# Altium PCB FlybackDriverZVS.PcbDoc
Units mm, origin at the board's own origin, x right, y up, seen from the top; angles counter-clockwise.
Board outline 62.6 x 92.6 mm, 2 copper layers (Top Layer, Bottom Layer), stack 1.331 mm thick; 25 components, 8 nets, 51 pads, 6 vias.
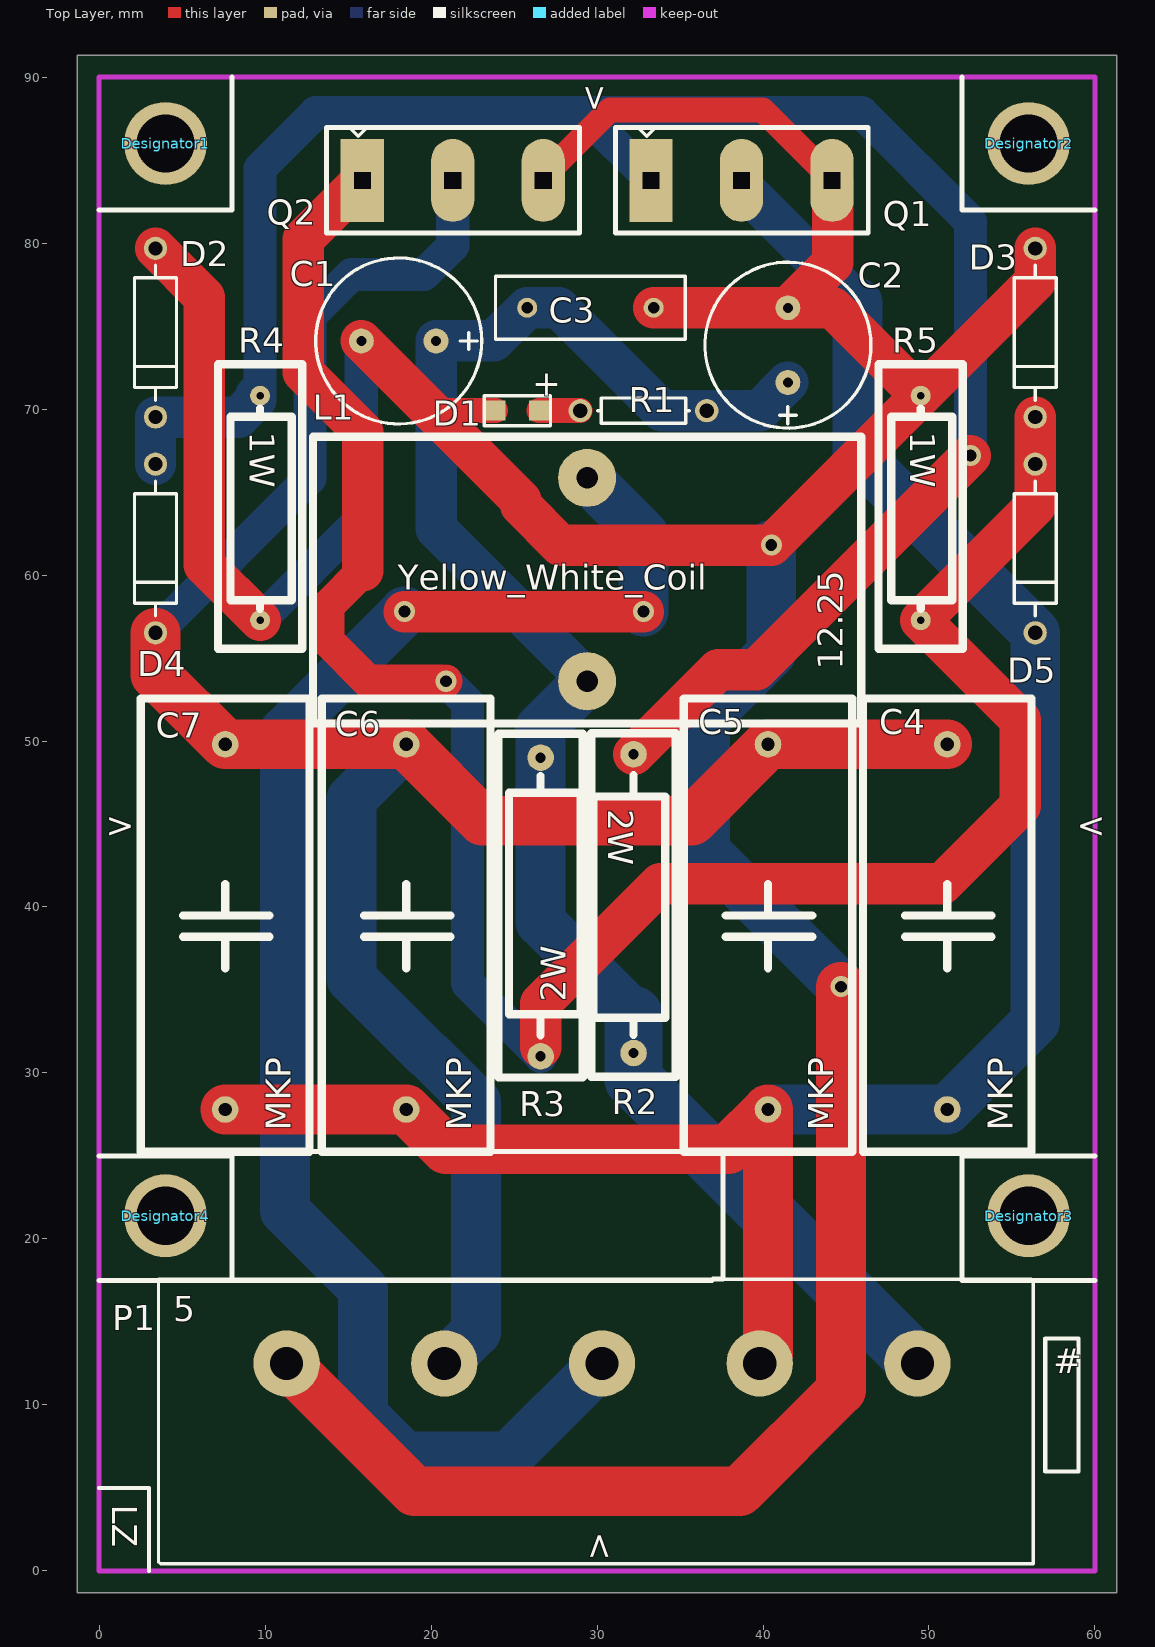
[diagram p0: Top Layer view]
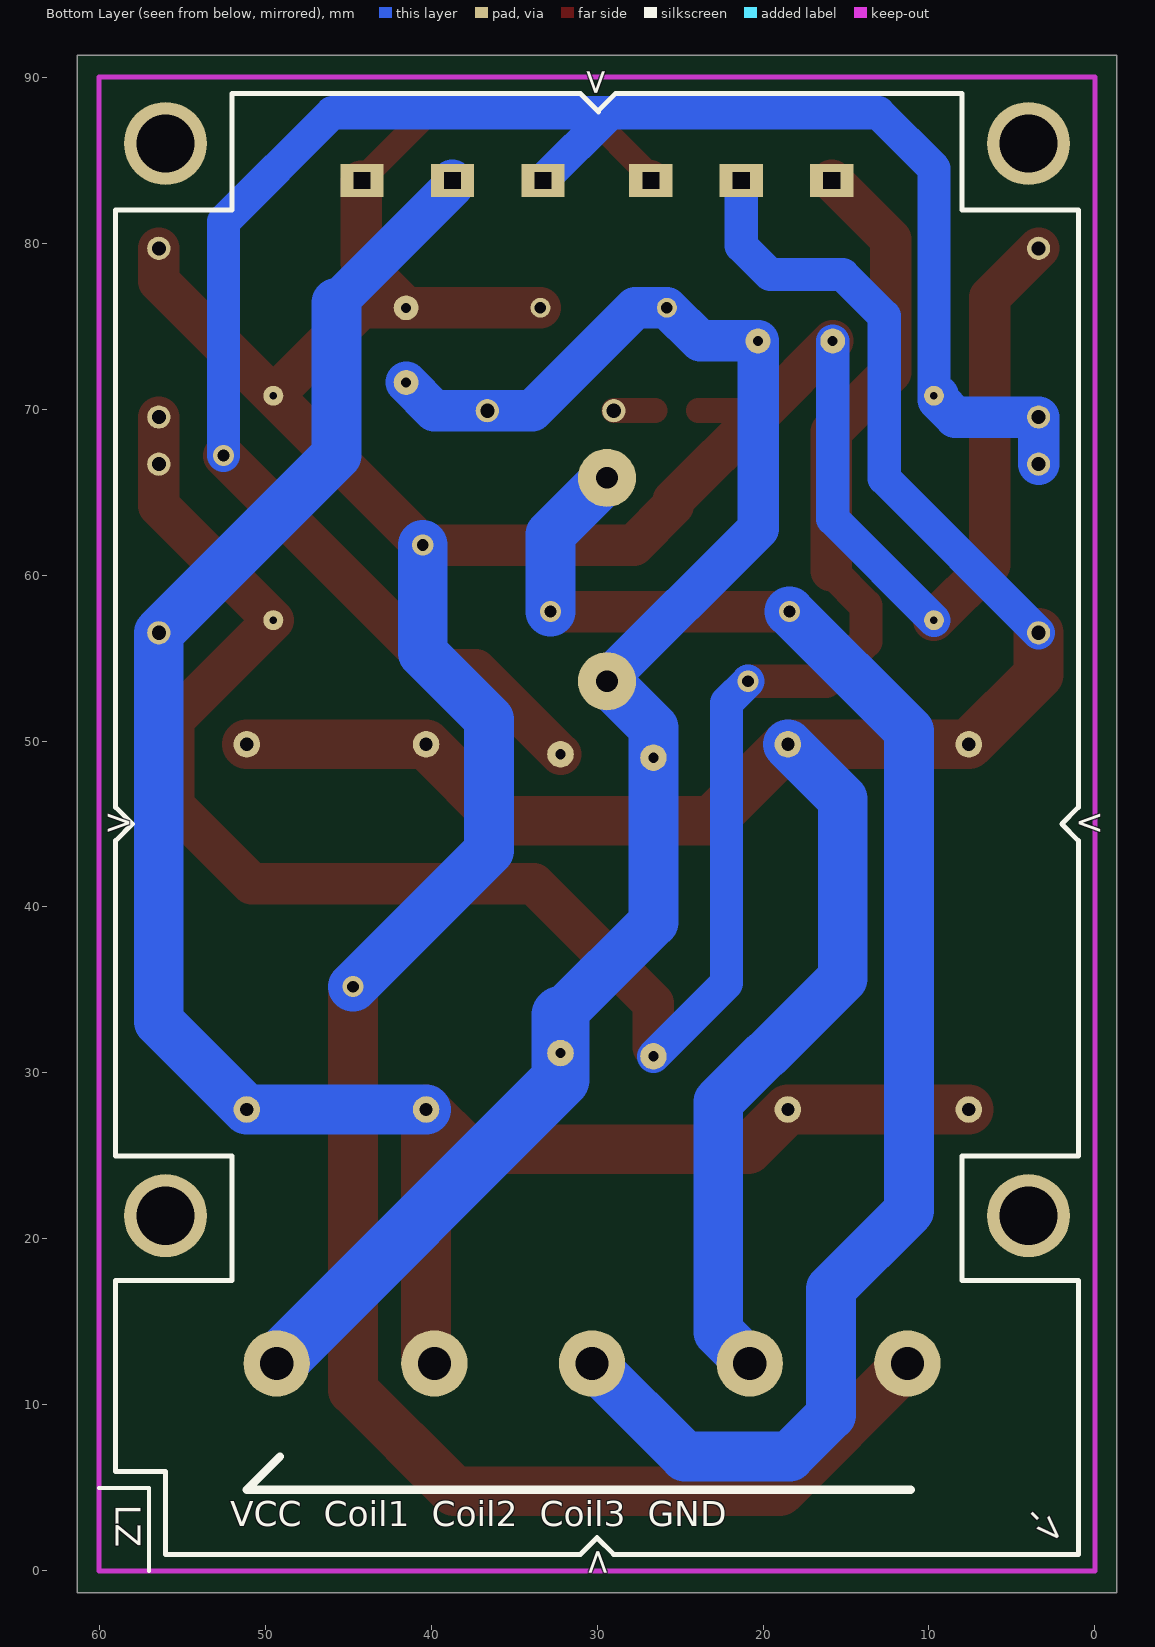
[diagram p1: Bottom Layer view, seen from below]

## Layer stack, top to bottom
Top Solder: solder mask 0.1016, Solder Resist, Dk 3.5
Top Layer: signal copper 0.3556
Dielectric 1: dielectric 0.62, FR-4, Dk 4.8
Bottom Layer: signal copper 0.3556
Bottom Solder: solder mask 0.1016, Solder Resist, Dk 3.5

## Board outline
-1.3,-1.3 61.3,-1.3 61.3,91.3 -1.3,91.3

## Design rules (kind name [scope] priority, off if disabled: settings)
Clearance [All] p1: gap=1 ignorepadtopadclearanceinfootprint=FALSE
DiffPairsRouting [All] p1: maxlimit=0.254 minlimit=1 mostfreqgap=1.5 toplayer_minwidth=0.5 toplayer_maxwidth=0.5 toplayer_prefwidth=0.5 bottomlayer_minwidth=0.5 bottomlayer_maxwidth=0.5 bottomlayer_prefwidth=0.5 maxuncoupledlength=12.7
HoleSize [All] p1: absolutevalues=TRUE maxlimit=5 minlimit=0.025 maxpercent=80.000 minpercent=20.000
MinimumSolderMaskSliver [All] p1: minsoldermaskwidth=0.1
PlaneClearance [All] p1: clearance=0.5
PolygonConnect [All] p1: connectstyle=Direct reliefconductorwidth=0.254 reliefentries=4 polygonreliefangle="90 Angle" airgapwidth=0.254
RoutingVias [All] p1: holewidth=0.6 width=1 viastyle="Through Hole" minholewidth=0.711 minwidth=1.27 maxholewidth=0.711 maxwidth=1.27
SilkToSilkClearance [All] p1: silktosilkclearance=0
SilkToSolderMaskClearance [IsPad] p1: minsilkscreentomaskgap=0 clearancetoexposedcopper=TRUE
SolderMaskExpansion [All] p1: expansion=0.5
UnpouredPolygon [All] p1: allowunpoured=TRUE allowshelved=TRUE
Width [All] p1: maxlimit=3.5 minlimit=0.5 preferedwidth=1.5
23 further rules are at their usual default settings.

## Classes and differential pairs
component class FlybackDriverZVS: C1 C2 C3 C4 C5 C6 C7 D1 D2 D3 D4 D5 L1 P1 Q1 Q2 R1 R2 R3 R4 R5

## Components (designator, comment, footprint, x,y, rotation, side; value= is the part's Value field where it differs from the comment)
C1 "" C4_5_10mm 15.8,74.1 r0 top value="35V 470uF"
C2 "" C4_5_10mm 41.5,76.1 r270 top value="35V 470uF"
C3 "" RAD-0.3 29.6,76.1 r180 top value=104
C4 "" MKP_Capacitor 51.1,27.8 r90 top value=630V
C5 "" MKP_Capacitor 40.3,27.8 r90 top value=630V
C6 "" MKP_Capacitor 18.5,27.8 r90 top value=630V
C7 "" MKP_Capacitor 7.6,27.8 r90 top value=630V
D1 "" 0805 25.2,69.9 r180 top
D2 "12V" DIODE-0.4 3.4,74.6 r270 top
D3 "12V" DIODE-0.4 56.4,74.6 r270 top
D4 "FR107" DIODE-0.4 3.4,61.6 r270 top
D5 "FR107" DIODE-0.4 56.4,61.6 r270 top
Designator1 "Comment" lash_eye_3mm#1 4,86 r0 top
Designator2 "Comment" lash_eye_3mm#2 56,86 r0 top
Designator3 "Comment" lash_eye_3mm#3 56,21.4 r0 top
Designator4 "Comment" lash_eye_3mm#4 4,21.4 r0 top
L1 "" HBL_30_10_H 29.4,53.6 r90 top value="220uH 10A 1.2mm"
P1 "WJ5P" CJ_10x5 49.3,12.5 r270 top
Q1 "IRFP250N" TO-247AC_ZCEDGE 31.1,80.6 r0 top
Q2 "IRFP250N" TO-247AC_ZCEDGE 13.7,80.6 r0 top
R1 "" AXIAL-0.3 32.8,69.9 r0 top value=6.8k
R2 "" 2WZC 32.2,49.2 r270 top value="470 2W"
R3 "" 2WZC 26.6,31 r90 top value="470 2W"
R4 "1W" 1WZC 9.7,70.8 r270 top value=10k
R5 "1W" 1WZC 49.5,70.8 r270 top value=10k

## Footprints (in the part's own frame and the unit in brackets; to place one, negate y for a bottom-side part, rotate by r counter-clockwise, add the part's x,y. Pads: shape width x height; smd on the part's side, far side on the other; paste and mask are expansions set on the pad)
1WZC [mm]
  round 1.2 hole 0.45: 1(0,0) 2(13.52,0)
  silkscreen extent -1.91,-2.54 15.24,2.54
2WZC [mm]
  round 1.6 hole 0.62: 1(0,0) 2(18,0)
  silkscreen extent -1.27,-2.54 19.43,2.54
0805 [mm]
  rect 1.2x1.2 smd: 1(-1.3,0) 2(1.3,0)
  silkscreen extent -2,-0.9 2,0.9
AXIAL-0.3 [mm] "Axial Device, Thru-Hole; 2 Leads; 0.3 in Pin Spacing"
  round 1.4 hole 0.85: 1(-3.81,0) 2(3.81,0)
  silkscreen extent -2.77,-0.76 2.77,0.76
C4_5_10mm [mm]
  round 1.5 hole 0.6: 1(0,0) 2(4.5,0)
  silkscreen extent -2.75,-5 7.25,5
CJ_10x5 [mm]
  round 4 hole 2: 1(0,0) 2(0,-9.5) 3(0,-19) 4(0,-28.5) 5(0,-38)
  silkscreen extent -5.08,-45.72 12.07,6.99
DIODE-0.4 [mm] "Diode, Thru-Hole; 2 Leads; 0.4 in Pin Spacing"
  round 1.4 hole 0.85: 1(-5.08,0) 2(5.08,0)
  silkscreen extent -4.06,-1.27 4.06,1.27
HBL_30_10_H [mm]
  round 3.5 hole 1.3: 1(0,0) 2(12.25,0)
  silkscreen extent -2.54,-16.51 14.73,16.51
lash_eye_3mm#1 [mm]
  round 5 hole 3.5: 1(0,0)
lash_eye_3mm#2 [mm]
  round 5 hole 3.5: 2(0,0)
lash_eye_3mm#3 [mm]
  round 5 hole 3.5: 3(0,0)
lash_eye_3mm#4 [mm]
  round 5 hole 3.5: 4(0,0)
MKP_Capacitor [mm]
  round 1.6 hole 0.8: 1(0,0) 2(22,0)
  silkscreen extent -2.54,-5.08 24.77,5.08
RAD-0.3 [mm] "Radial Cap, Thru-Hole; 2 Leads; 0.3 in Pin Spacing"
  round 1.2 hole 0.7: 1(-3.81,0) 2(3.81,0)
  silkscreen extent -5.71,-1.91 5.71,1.91
TO-247AC_ZCEDGE [mm]
  oval 2.6x5 / inner rect 2.6x2 / far side rect 2.6x2 hole 1 square: D(7.609,3.175) S(13.059,3.175)
  rect 2.6x5 / inner rect 2.6x2 / far side rect 2.6x2 hole 1 square: G(2.159,3.175)
  silkscreen extent 0,0 15.24,6.35

## Part data
C1 C2: library part "Cap Pol1", "Polarized Capacitor (Radial)", LatestRevisionDate=17-Jul-2002, LatestRevisionNote="Re-released for DXP Platform.", PackageDescription="Polarized Capacitor (Radial); 2 Leads", PackageReference=RB7.6-15, Published=8-Jun-2000, Publisher="Altium Limited"
C3: library part Cap, "Capacitor", LatestRevisionDate=17-Jul-2002, LatestRevisionNote="Re-released for DXP Platform.", PackageDescription="Radial Cap, Thru-Hole; 2 Leads; 0.3 in Pin Spacing", PackageReference=RAD-0.3, Published=8-Jun-2000, Publisher="Altium Limited"
C4 C5 C6 C7: library part 普通电容, "Capacitor", Capacitance=0.3uF
D1: library part LED3, "Typical BLUE SiC LED", DatasheetVersion=16-Apr-2002, LatestRevisionDate=17-Dec-2003, LatestRevisionNote="PCB Footprint replaced.", PackageDescription="SM LED; 2 C-Bend Leads; Body 3.5 x 2.8 x 1.9 mm, inc leads (LxWxH typ)", PackageReference=3.5X2.8X1.9, PackageVersion=16-Apr-2002, Published=8-Jun-2000, Publisher="Altium Limited"
D2 D3: library part "D Zener", "Zener Diode", LatestRevisionDate=17-Jul-2002, LatestRevisionNote="Re-released for DXP Platform.", PackageDescription="Diode, Thru-Hole; 2 Leads; 0.7 in Pin Spacing", PackageReference=DIODE-0.7, Published=8-Jun-2000, Publisher="Altium Limited"
D4 D5: library part "Diode 1N4007", "1 Amp General Purpose Rectifier", Code_JEDEC=DO-204-AL, ComponentLink1Description="Manufacturer Link", ComponentLink1URL=http://www.fairchildsemi.com/, ComponentLink2Description=Datasheet, ComponentLink2URL=http://www.fairchildsemi.com/ds/1N%2F1N4001.pdf, DatasheetVersion=1998, LatestRevisionDate=17-Jul-2002, LatestRevisionNote="Re-released for DXP Platform.", PackageDescription="Diode, Axial; Body 5.2 x 2.7 mm (LxDia. max), Lead Dia. 0.86 mm (max)", PackageReference=DO-41, PackageVersion=Aug-1999, Published=8-Jun-2000, Publisher="Altium Limited"
L1: library part "Inductor Iron", "Magnetic-Core Inductor", LatestRevisionDate=17-Jul-2002, LatestRevisionNote="Re-released for DXP Platform.", PackageDescription="Axial Device, Thru-Hole; 2 Leads; 0.9 in Pin Spacing", PackageReference=AXIAL-0.9, Published=24-Mar-1999, Publisher="Altium Limited"
P1: library part WJ5P_381
Q1 Q2: library part "MOSFET N", Max Current=50A, Max Voltage=200V
R1 R2 R3 R4 R5: library part Res1, "Resistor", LatestRevisionDate=17-Jul-2002, LatestRevisionNote="Re-released for DXP Platform.", PackageDescription="Axial Device, Thru-Hole; 2 Leads; 0.3 in Pin Spacing", PackageReference=AXIAL-0.3, Published=8-Jun-2000, Publisher="Altium Limited"

## Via types
v1: diameter 1.27, hole 0.711, Top Layer to Bottom Layer, tented both sides, 6 vias

## Nets (pads, with @x,y where several pads share a name; then routed paths per layer and width w, separated by ;. In a path a pad name is that pad's centre, name@x,y a point inside that pad or via, vN(x,y) a via of type N, cw(c..) or ccw(c..) an arc to the next point about the centre after c; other vN are vias at no path point)
GND: C1.1 C2.1 C3.1 D1.2 D2.1 D3.1 P1.5 Q1.S Q2.S R4.2 R5.1 | length 245.8
  Top Layer w1.5: 20,69.9 D1.2 ; Q2.S@26.759,84.009 30.775,88.025 39.972,88.025 Q1.S@44.159,83.838
  Top Layer w2: Q2.S Q2.S@26.759,84.009
  Top Layer w2.5: D2.1 6.35,76.73 6.35,60.63 R4.2 ; C1.1 20,69.9 25.4,64.5 25.4,64.193 27.793,61.8 v1(40.5,61.8) R5.1 ; C3.1 C2.1 ; Q1.S@44.2,83.734 44.2,78.8 C2.1 ; D3.1 56.4,77.7 R5.1 ; C2.1 44.2,76.1 R5.1
  Top Layer w3: P1.5 19,4.8 38.6,4.8 44.7,10.9 v1(44.7,35.2)
  Bottom Layer w2: R4.2 15.8,63.38 C1.1
  Bottom Layer w3: v1(40.5,61.8) 40.5,55.3 36.5,51.3 36.5,43.4 v1(44.7,35.2)
NetC4_1: C4.1 C5.1 C6.1 C7.1 D5.2 P1.2 Q1.D | length 126.5
  Top Layer w3: C7.1 C6.1 20.9,25.4 37.9,25.4 C5.1 40.3,13 P1.2
  Bottom Layer w2.5: Q1.D 38.709,83.391 45.7,76.4
  Bottom Layer w3: C5.1 C4.1 56.4,33.1 D5.2 45.7,67.22 45.7,76.4
NetC4_2: C4.2 C5.2 C6.2 C7.2 D4.2 P1.4 Q2.D | length 135.6
  Top Layer w3: D4.2 3.4,54 C7.2 C6.2 23.1,45.2 35.7,45.2 C5.2 C4.2
  Bottom Layer w2: D4.2 12.7,65.82 12.7,75.6 15.2,78.1 19.567,78.1 21.309,79.842 Q2.D
  Bottom Layer w3: C6.2 15.2,46.5 15.2,35.7 19.8,31.1 19.867,31.1 22.7,28.267 22.7,14.4 P1.4
NetD1_1: D1.1 R1.1 | length 2.5
  Top Layer w1.5: D1.1 R1.1
NetD2_2: D2.2 D4.1 Q1.G R2.1 R4.1 | length 117.8
  Top Layer w2.5: R2.1 37.3,54.3 39.6,54.3 v1(52.5,67.2)
  Bottom Layer w2: R4.1 9.7,84.5 13.05,87.85 29.184,87.85 ; Q1.G 29.184,87.85 ; v1(52.5,67.2) 52.5,81.3 45.95,87.85 29.184,87.85
  Bottom Layer w2.5: D4.1 D2.2 8.42,69.52 9.45,70.55 R4.1@9.45,70.8
NetD3_2: D3.2 D5.1 Q2.G R3.1 R5.2 | length 129.9
  Top Layer w2: 15.9,60.25 13.8,58.15 13.8,56 16.2,53.6 v1(20.9,53.6)
  Top Layer w2.5: Q2.G 12.3,80.216 12.3,72.231 15.9,68.631 15.9,60.25 ; R3.1@26.6,31.55 26.6,34.2 33.8,41.4 50.8,41.4 55.5,46.1 55.5,51.28 R5.2 56.4,64.18 D5.1 D3.2
  Bottom Layer w2: v1(20.9,53.6) 22.2,52.3 22.2,35.4 R3.1
NetL1_2: L1.2 P1.3 | length 94.9
  Top Layer w2.5: v1(18.4,57.8) v1(32.8,57.8)
  Bottom Layer w3: v1(18.4,57.8) 11.2,50.6 11.2,21.7 15.9,17 15.9,9.4 18.4,6.9 24.7,6.9 P1.3 ; L1.2 32.8,62.45 v1(32.8,57.8)
VCC24V: C1.2 C2.2 C3.2 L1.1 P1.1 R1.2 R2.2 R3.2 | length 101.2
  Bottom Layer w2.5: L1.1 29.4,53.7 20.3,62.8 C1.2 23.79,74.1 C3.2 27.7,76.1 33.9,69.9 R1.2 39.8,69.9 C2.2
  Bottom Layer w3: L1.1 26.6,50.8 R3.2 26.6,39.1 32.2,33.5
  Bottom Layer w3.5: 32.2,33.5 R2.2 32.2,29.6 P1.1
pads on no net: Designator1.1 Designator2.2 Designator3.3 Designator4.4

## Keep-outs
Keep-Out Layer:
  lines w0.3: 0,0 60,0 60,90 0,90 0,0

## Silkscreen, mask and mechanical layers (free items; w line width, h text height)
Top Overlay:
  lines w0.1: 8,25 8,17.5 36.92,17.5 37,17.58
  lines w0.25: 0,5 3,5 3,0 ; 57,6 57,14 59,14 59,6 57,6
  lines w0.3: 0,17.5 8,17.5 ; 0,25 8,25 8,17.5 ; 0,82 8,82 8,90 ; 37,25.26 8,25.26 8,17.5 ; 37.6,25.26 37.6,17.58 37,17.58 ; 52,90 52,82 60,82 ; 60,17.5 52,17.5 52,25 60,25 ; 8,17.5 36.92,17.5 ; 36.92,17.5 37,17.58 ; 36.92,17.5 37,17.58
  text ">" at 29.2,89.6 h1.52 r270
  text "+" at 26.1,70.8 h1.52
  text "Yellow_White_Coil" at 18,59.1 h1.52
  text ">" at 0.4,44.2 h1.52
  text "<" at 58.9,44.2 h1.52
  text "#" at 57.5,11.9 h1.52
  text "LZ" at 0.8,4 h1.52 r270
  text ">" at 30.8,0.6 h1.52 r90
Bottom Overlay:
  lines w0.25: 57,0 57,5 60,5
  lines w0.3: 2,45 1,44 1,25 8,25 8,17.5 1,17.5 1,1 29,1 30,2 ; 2,45 2,45 ; 2,45 1,46 1,82 8,82 8,89 28.9,89 29.9,88 29.9,87.9 31,89 52,89 52,82 59,82 59,46 58,45 ; 30,2 31,1 56,1 56,6 59,6 59,17.5 52,17.5 52,25 59,25 59,44 58,45 ; 30,2 30,2 ; 58,45 58,45
  lines w0.5: 11.1,4.9 51.1,4.9 ; 49.1,6.9 51.1,4.9 ; 51.1,4.9 51.1,4.9
  text "<" at 30.7,88.8 h1.52 r90
  text "<" at 1.2,45.7 h1.52 r180
  text ">" at 59.7,45.7 h1.52 r180
  text "LZ" at 59,4 h1.52 r90
  text "VCC  Coil1  Coil2  Coil3  GND" at 52.1,2.7 h1.52
  text "<-" at 2.5,1.4 h1.52 r45
  text "<" at 29.3,1.4 h1.52 r270
Top Solder:
  lines w1.5: 26.759,84.059 26.759,83.775 26.759,83.959 30.8,88 39.934,88 44.159,83.775
  lines w2.5: 18.4,57.8 32.8,57.8
  text "FlybackDriverZVS" at 9.1,21.5 h1.52
  text "T.WKVER@Lordz Zidel" at 9,18.8 h1.52
Bottom Solder:
  lines w1.5: 41.5,76.1 41.5,76.1
  lines w2: 3.4,56.52 12.7,65.82 12.7,75.6 15.2,78.1 19.6,78.1 21.309,79.809 21.309,83.775 ; 9.7,57.28 15.8,63.38 15.8,74.1 ; 9.7,70.8 9.7,84.5 13.3,88.1 45.7,88.1 52.5,81.3 52.5,67.2 ; 20.9,53.6 22.2,52.3 22.2,35.4 26.6,31 ; 29,88.1 33.259,83.841 33.259,83.775
  lines w2.5: 3.4,66.68 3.4,69.52 8.42,69.52 9.7,70.8 ; 29.4,53.6 20.3,62.7 20.3,74.1 23.79,74.1 25.79,76.1 27.7,76.1 33.9,69.9 36.61,69.9 ; 36.51,69.8 36.61,69.9 ; 38.709,83.7 38.709,83.391 ; 38.709,83.775 38.709,83.391 ; 41.5,71.6 39.8,69.9 36.61,69.9 ; 45.7,76.4 38.709,83.391
  lines w3: 20.8,12.5 22.7,14.4 22.7,28.2 15.3,35.6 15.2,35.6 15.2,46.5 18.5,49.8 ; 29.4,53.6 29.3,53.6 26.6,50.9 26.6,49 26.6,39.1 32.2,33.5 ; 29.4,65.85 29.4,65.8 32.8,62.4 32.8,57.8 ; 30.3,12.5 24.7,6.9 18.4,6.9 15.9,9.4 15.9,17 11.2,21.7 ; 40.3,27.8 51.1,27.8 56.4,33.1 56.4,56.52 45.7,67.22 45.7,76.4 ; 40.5,61.8 40.5,55.3 36.7,51.5 36.7,43.2 44.7,35.2 ; 11.2,21.7 11.2,21.7 ; 11.2,21.7 11.2,50.6 18.4,57.8 ; 18.4,57.8 18.4,57.8 ; 18.5,49.8 18.5,49.8
  lines w3.5: 32.2,33.5 32.2,31.2 32.2,29.6 49.3,12.5
  text "v0p5_LTE" at 51.1,45.9 h1.52 r90

## Dimensions
-1.3,-1.3 to 0,0 on Mechanical 1
-1.3,-1.3 to 0,0 on Mechanical 1

## Text inside footprints (layer, text, board x,y; h text height)
C4: Top Overlay "MKP" at 55.037,26.53 h1.52 r90
C5: Top Overlay "MKP" at 44.237,26.53 h1.52 r90
C6: Top Overlay "MKP" at 22.437,26.53 h1.52 r90
C7: Top Overlay "MKP" at 11.537,26.53 h1.52 r90
L1: Top Overlay "12.25" at 44.8,54.3 h1.52 r90
P1: Top Overlay "5" at 4.469,15.04 h1.52
R2: Top Overlay "2W" at 30.676,45.898 h1.52 r270
R3: Top Overlay "2W" at 28.124,34.302 h1.52 r90